# Altium PCB FIT_PM_Dual_Range_AFE.PcbDoc (part 15 of 17)
Units mm, origin at the board's own origin, x right, y up, seen from the top; angles counter-clockwise.
Board outline 259 x 114 mm, 8 copper layers (Top Layer, Mid-Layer 1, Mid-Layer 2, Layer 1, Layer 2, Mid-Layer 3, Mid-Layer 4, Bottom Layer), stack 1.616 mm thick; 963 components, 806 nets, 4757 pads, 2208 vias.
Unrouted connection lines stored in the file: 682.
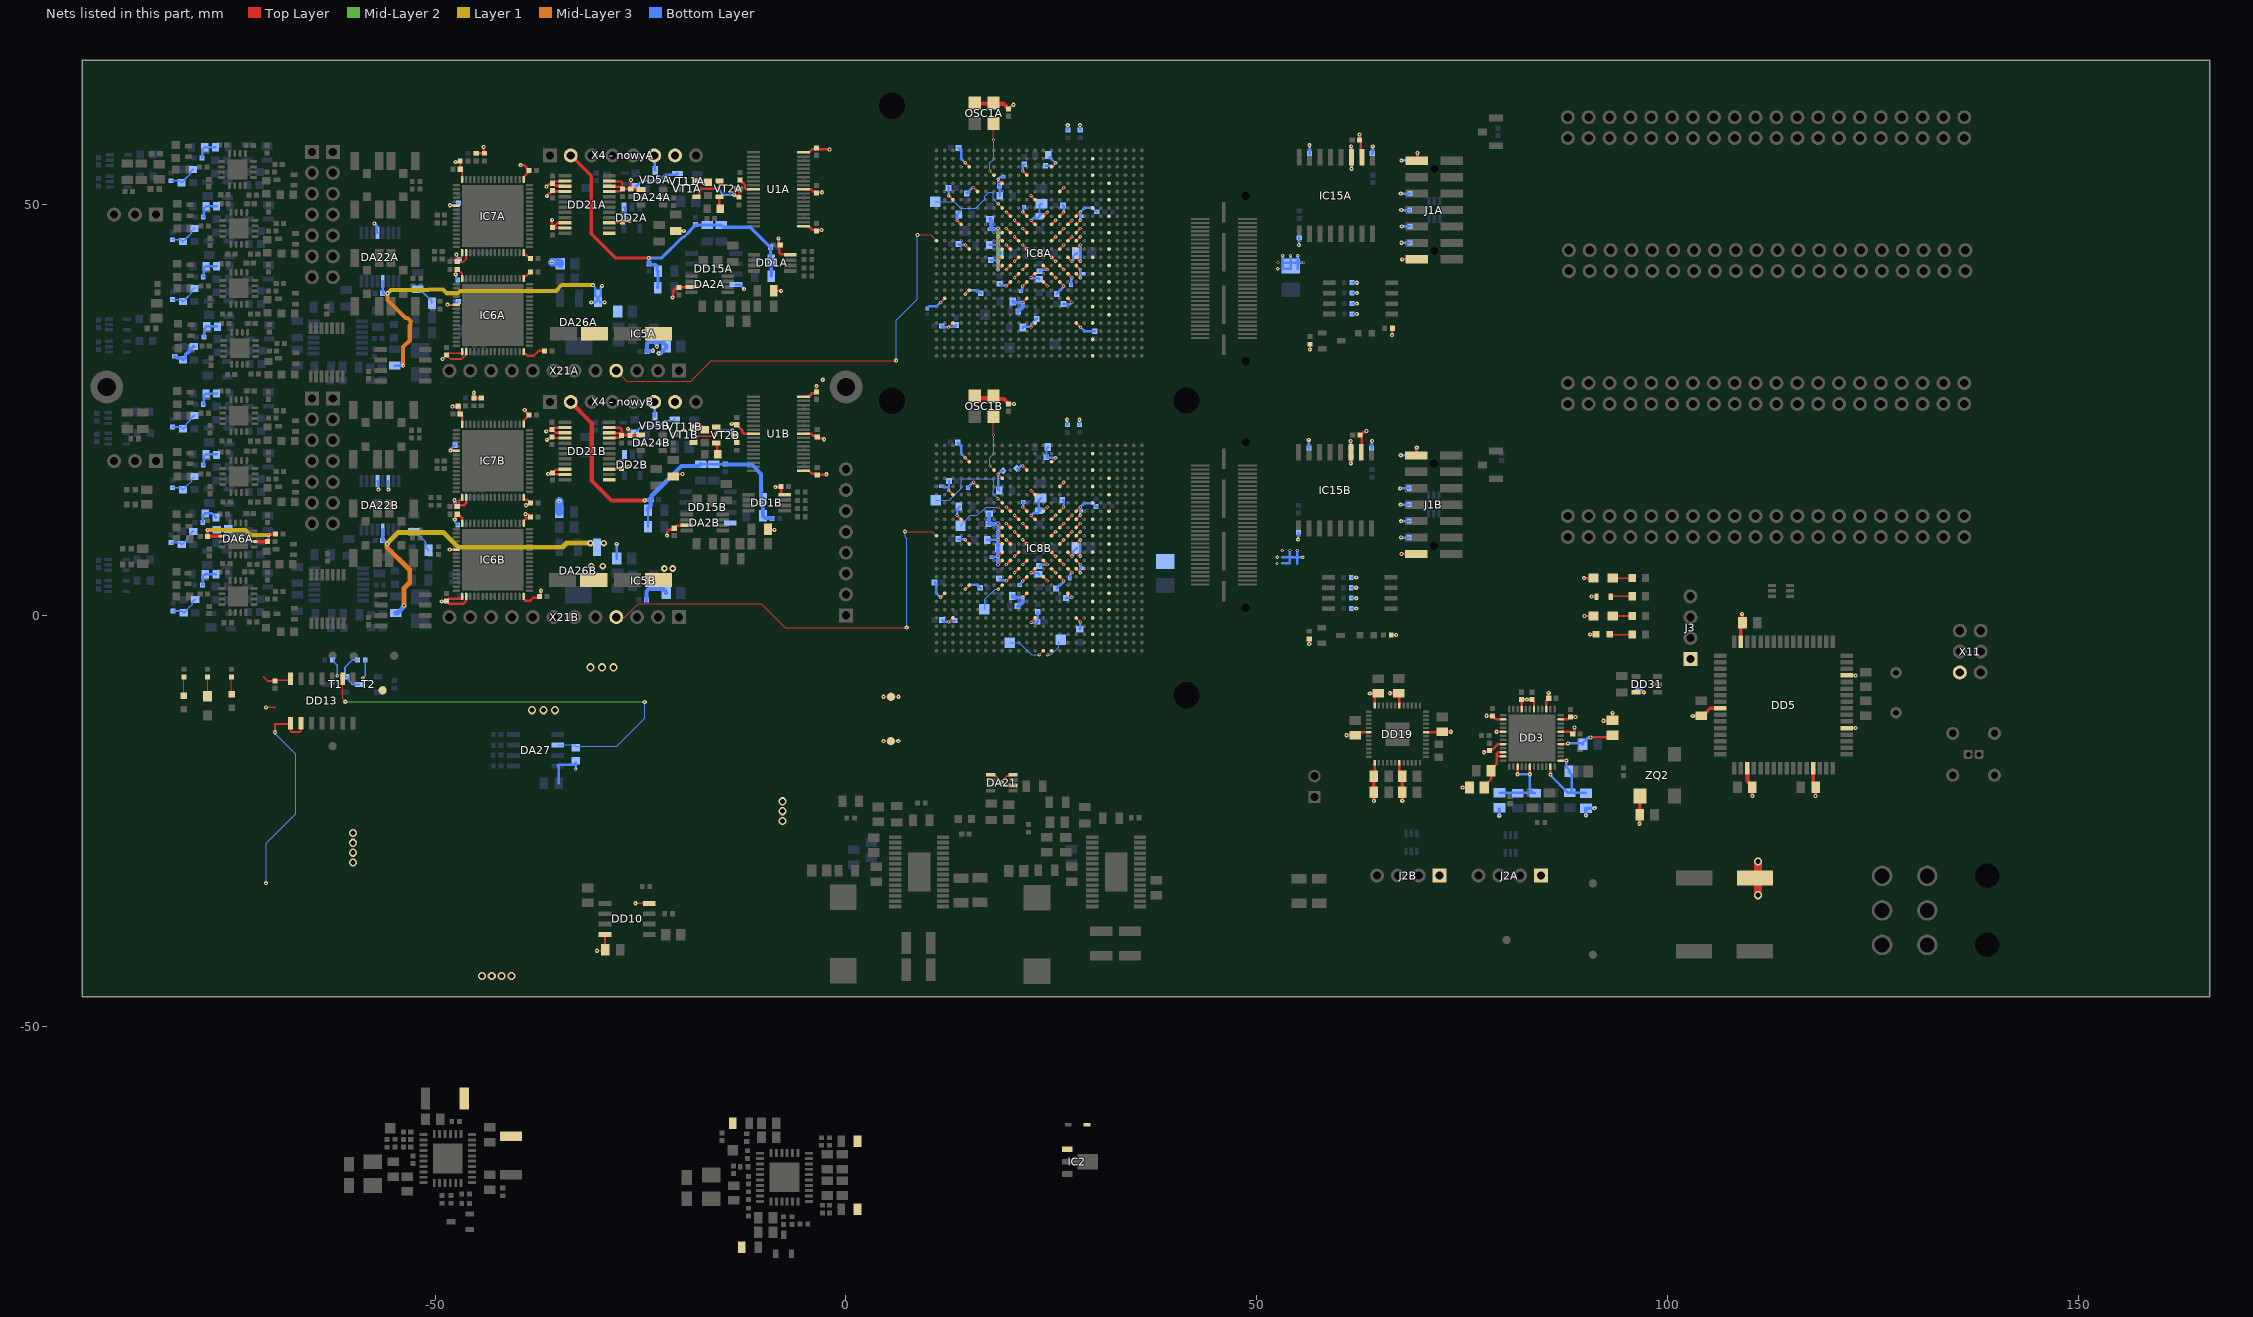
[diagram p17: the nets of this part, all layers, seen from the top]

## Via types
v1: diameter 0.5, hole 0.2, Top Layer to Bottom Layer, tented both sides, 1234 vias
v2: diameter 0.4, hole 0.2, Top Layer to Bottom Layer, tented both sides, 876 vias
v3: diameter 1, hole 0.6, Top Layer to Bottom Layer, tented both sides, 74 vias
v4: diameter 0.8, hole 0.4, Top Layer to Bottom Layer, tented both sides, 15 vias
v5: diameter 0.5, hole 0.2, Top Layer to Bottom Layer, 9 vias

## Nets (pads, with @x,y where several pads share a name; then routed paths per layer and width w, separated by ;. In a path a pad name is that pad's centre, name@x,y a point inside that pad or via, vN(x,y) a via of type N, cw(c..) or ccw(c..) an arc to the next point about the centre after c; other vN are vias at no path point) (continued)
NetIC8A_W18: IC8A.W18 TP2A.1 | length 10.6
  Top Layer w0.145: v2(18.519,50.086) IC8A.W18@19.019,49.586
  Bottom Layer w0.145: TP2A.1@10.891,50.356 13.149,50.356 13.957,49.548 15.781,49.548 16.892,50.658 16.892,50.985 17.39,51.484 17.727,51.484 17.902,51.309 17.902,50.703 v2(18.519,50.086)
NetIC8B_A12: IC8B.A12 TP6B.1 | length 3.2
  Top Layer w0.145: v2(24.519,-4.814) IC8B.A12@25.019,-4.314
  Bottom Layer w0.145: v2(24.519,-4.814) 24.953,-4.814 25.896,-3.871 TP6B.1@25.896,-3.189
NetIC8B_A13: IC8B.A13 TP5B.1 | length 4.9
  Top Layer w0.145: v2(23.519,-4.814) IC8B.A13@24.019,-4.314
  Bottom Layer w0.145: TP5B.1@19.919,-3.314 21.119,-3.314 22.619,-4.814 v2(23.519,-4.814)
NetIC8B_J18: IC8B.J18 TP4B.1 | length 4.1
  Top Layer w0.145: v2(18.519,3.186) IC8B.J18@19.019,3.686
  Bottom Layer w0.145: TP4B.1@16.919,0.686 16.919,1.955 18.15,3.186 v2(18.519,3.186)
NetIC8B_V18: IC8B.V18 TP3B.1 | length 6.3
  Top Layer w0.145: v2(18.512,13.186) 18.515,13.186 19.015,12.686 IC8B.V18@19.019,12.686
  Bottom Layer w0.145: TP3B.1@13.942,10.922 14.504,11.484 14.504,11.535 15.135,12.167 15.973,12.167 16.62,12.813 16.7,12.813 17.073,13.186 v2(18.512,13.186)
NetIC8B_W18: IC8B.W18 TP2B.1 | length 12
  Top Layer w0.145: v2(18.512,14.186) 18.515,14.186 19.015,13.686 IC8B.W18@19.019,13.686
  Bottom Layer w0.145: TP2B.1@10.919,13.995 10.952,14.028 12.566,14.028 14.01,15.472 14.01,16.375 14.235,16.6 17.74,16.6 17.994,16.347 17.994,15.375 17.902,15.283 17.902,14.803 18.512,14.193 v2(18.512,14.186)
NetIC15A_3: IC15A.3 R169A.2 | length 2.3
  Top Layer w0.145: IC15A.3@61.524,55.736 61.532,55.728 v1(61.532,54.363)
  Bottom Layer w0.35: R169A.2@61.524,55.266 61.528,55.262 61.528,54.367 v1(61.532,54.363)
NetIC15B_3: IC15B.3 R169B.2 | length 2.3
  Top Layer w0.145: IC15B.3@61.449,19.872 61.457,19.864 v1(61.457,18.499)
  Bottom Layer w0.35: R169B.2@61.449,19.402 61.453,19.398 61.453,18.503 v1(61.457,18.499)
NetJ1A_14: J1A.14 R156A.1 | length 1.8
  Top Layer w0.3: J1A.14@69.494,55.336 69.548,55.39 v1(69.548,56.271)
  Bottom Layer w0.3: v1(69.548,56.271) 69.554,56.266 69.554,55.397 R156A.1@69.559,55.391
NetJ1B_14: J1B.14 R156B.1 | length 1.8
  Top Layer w0.3: J1B.14@69.419,19.472 69.473,19.526 v1(69.473,20.408)
  Bottom Layer w0.3: v1(69.473,20.408) 69.479,20.402 69.479,19.534 R156B.1@69.484,19.528
NetLD1_2: LD1.2 R147.2 | length 2.1
  Top Layer w0.145: R147.2@-74.798,-7.494 -74.798,-9.572 LD1.2@-74.781,-9.589
NetLD2_1: LD2.1 R160.2 | length 2.3
  Top Layer w0.2: LD2.1@93.194,2.336 R160.2@95.519,2.336
NetLD3_1: LD3.1 R162.2 | length 2.3
  Top Layer w0.2: LD3.1@93.344,-2.347 R162.2@95.669,-2.347
NetLD4_1: LD4.1 R114.2 | length 2.3
  Top Layer w0.145: R114.2@-80.597,-7.494 -80.581,-7.51 LD4.1@-80.581,-9.789
NetR13A_1: R13A.1 R233A.2 R234A.2 | length 2.8
  Bottom Layer w0.3: R233A.2@-78.3,11.3 -78.3,12.1 R234A.2@-78,12.4 -77.2,12.4 -77.05,12.25 -76.975,12.25 -76.7,11.975 R13A.1@-76.7,11.9
NetR13B_1: R13B.1 R233B.2 R234B.2 | length 2.7
  Bottom Layer w0.3: R233B.2@-78.23,25.7 -78.2,25.73 -78.2,26.7 R234B.2@-77.9,27 R13B.1@-76.6,27
NetR13C_1: R13C.1 R233C.2 R234C.2 | length 2.7
  Bottom Layer w0.3: R233C.2@-78.23,41.2 -78.2,41.23 -78.2,42.2 R234C.2@-77.9,42.5 R13C.1@-76.6,42.5
NetR13D_1: R13D.1 R233D.2 R234D.2 | length 2.7
  Bottom Layer w0.3: R233D.2@-78.398,55.668 -78.368,55.698 -78.368,56.668 R234D.2@-78.068,56.968 R13D.1@-76.768,56.968
NetR19A_1: R19A.1 R235A.2 R236A.2 | length 3.6
  Bottom Layer w0.2: R235A.2@-82.15,8.855 -81.08,8.855 R236A.2@-80.85,8.625 -80.8,8.625 -80.2,9.225 -80.2,9.475 -79.85,9.825 -79.85,9.9 -79.525,10.225 R19A.1@-79.45,10.225
NetR19B_1: R19B.1 R235B.2 R236B.2 | length 3.6
  Bottom Layer w0.2: R235B.2@-82,22.93 -80.93,22.93 R236B.2@-80.7,22.7 -80.663,22.7 -80.313,23.05 -80.313,23.287 -79.7,23.9 -79.7,23.975 -79.375,24.3 R19B.1@-79.3,24.3
NetR19C_1: R19C.1 R235C.2 R236C.2 | length 3.6
  Bottom Layer w0.2: R235C.2@-82,38.43 -80.93,38.43 R236C.2@-80.7,38.2 -80.65,38.2 -80.3,38.55 -80.3,38.6 -79.675,39.225 -79.675,39.475 -79.35,39.8 R19C.1@-79.3,39.8
NetR19D_1: R19D.1 R235D.2 R236D.2 | length 3.6
  Bottom Layer w0.2: R235D.2@-82.168,52.898 -81.098,52.898 R236D.2@-80.868,52.668 -80.818,52.668 -80.468,53.018 -80.468,53.068 -79.843,53.693 -79.843,53.943 -79.518,54.268 R19D.1@-79.468,54.268
NetR33A_1: R33A.1 R237A.2 R238A.2 | length 2.7
  Bottom Layer w0.3: R238A.2@-78.33,3.7 -78.3,3.73 -78.3,4.7 R237A.2@-78,5 R33A.1@-76.7,5
NetR33B_1: R33B.1 R237B.2 R238B.2 | length 2.7
  Bottom Layer w0.3: R238B.2@-78.23,18.3 -78.2,18.33 -78.2,19.3 R237B.2@-77.9,19.6 R33B.1@-76.6,19.6
NetR33C_1: R33C.1 R237C.2 R238C.2 | length 2.7
  Bottom Layer w0.3: R238C.2@-78.13,33.9 -78.1,33.93 -78.1,34.9 R237C.2@-77.8,35.2 R33C.1@-76.5,35.2
NetR33D_1: R33D.1 R237D.2 R238D.2 | length 2.7
  Bottom Layer w0.3: R238D.2@-78.23,48.5 -78.2,48.53 -78.2,49.5 R237D.2@-77.9,49.8 R33D.1@-76.6,49.8
NetR38A_1: R38A.1 R239A.2 R240A.2 | length 3.6
  Bottom Layer w0.2: R240A.2@-81.9,0.53 -80.83,0.53 R239A.2@-80.6,0.3 -80.55,0.3 -80.2,0.65 -80.2,0.7 -79.575,1.325 -79.575,1.575 -79.25,1.9 R38A.1@-79.2,1.9
NetR38B_1: R38B.1 R239B.2 R240B.2 | length 3.6
  Bottom Layer w0.15: R239B.2@-80.7,15.3 -80.65,15.3 -80.275,15.675 -80.275,15.725 -79.662,16.338 -79.662,16.55 -79.312,16.9 R38B.1@-79.3,16.9
  Bottom Layer w0.2: R240B.2@-82,15.53 -80.93,15.53 R239B.2@-80.7,15.3
NetR38C_1: R38C.1 R239C.2 R240C.2 | length 3.4
  Bottom Layer w0.4: R240C.2@-81.7,31.53 -81.68,31.53 -81.5,31.35 -80.95,31.35 R239C.2@-80.7,31.1 -80.65,31.1 -80.4,31.35 -80.4,31.716 -80.166,31.95 -80.076,31.95 -79.9,32.126 -79.9,32.275 -79.475,32.7 R38C.1@-79.4,32.7
NetR38D_1: R38D.1 R239D.2 R240D.2 | length 3.6
  Bottom Layer w0.2: R240D.2@-82,45.73 -80.93,45.73 R239D.2@-80.7,45.5 -80.65,45.5 -80.3,45.85 -80.3,45.9 -79.675,46.525 -79.675,46.775 -79.35,47.1 R38D.1@-79.3,47.1
NetR44A_1: R44A.1 R46A.2 | length 2.5
  Bottom Layer w0.2: R46A.2@-52.1,39.7 -51.725,39.325 -51.5,39.325 -50.4,38.225 R44A.1@-50.4,38
NetR44B_1: R44B.1 R46B.2 | length 3.2
  Bottom Layer w0.2: R46B.2@-52.624,10.179 -52.399,10.179 -51.175,8.955 -51.175,8.275 R44B.1@-50.8,7.9
NetR49A_1: R49A.1 VT1A.2 | length 1.5
  Top Layer w0.5: VT1A.2@-18.2,52.85 -18.15,52.8 -16.9,52.8 R49A.1@-16.8,52.7
NetR49B_1: R49B.1 VT1B.2 | length 1.5
  Top Layer w0.5: VT1B.2@-18.55,22.95 -18.5,22.9 -17.55,22.9 -17.25,22.6 R49B.1@-17.2,22.6
NetR50A_1: R50A.1 VT2A.2 | length 1.5
  Top Layer w0.3: VT2A.2@-15.4,50.95 -15.4,49.6 R50A.1@-15.3,49.5
NetR50B_1: R50B.1 VT2B.2 | length 1.5
  Top Layer w0.3: VT2B.2@-15.8,21 -15.65,20.85 -15.65,19.65 R50B.1@-15.6,19.6
NetR51A_2: R51A.2 VT1A.1 VT2A.1 VT2A.3 | length 8.4
  Top Layer w0.3: VT1A.1@-18.2,50.95 -18,50.95 -17.85,51.1 -17.85,51.65 -17.6,51.9 v1(-15.6,51.9) -15.4,52.1 VT2A.1@-15.4,52.85 ; v1(-13.6,51.2) -13.44,51.04 -13.14,51.04 R51A.2@-13,50.9 -13,51.8 VT2A.3@-13.1,51.9
  Bottom Layer w0.3: v1(-15.6,51.9) -14.9,51.2 v1(-13.6,51.2)
NetR51B_2: R51B.2 VT1B.1 VT2B.1 VT2B.3 | length 8.1
  Top Layer w0.2: VT1B.1@-18.55,21.05 -18.35,21.05 -18.15,21.25 -18.15,21.65 -18,21.8 -16.1,21.8 v1(-15.8,22.1) VT2B.1@-15.8,22.9 ; v1(-13.797,22.503) -13.797,22.15 -13.8,22.15 -13.6,21.95 VT2B.3@-13.5,21.95 -13.3,21.75 R51B.2@-13.3,21.04
  Bottom Layer w0.2: v1(-15.8,22.1) -15.397,22.503 v1(-13.797,22.503)
NetR54A_2: R54A.2 VT11A.4 | length 5.8
  Bottom Layer w0.3: R54A.2@-25.6,52.2 -25.55,52.2 -24.85,52.9 -22.7,52.9 -21.95,53.65 -20.65,53.65 VT11A.4@-20.5,53.8
NetR54B_2: R54B.2 VT11B.4 | length 5.6
  Bottom Layer w0.2: R54B.2@-25.7,22.2 -25.65,22.2 -24.85,23 -22.8,23 -22.1,23.7 -21.05,23.7 VT11B.4@-20.85,23.9
NetR83_1: R83.1 T1.1 T2.3 | length 5.3
  Bottom Layer w0.2: R83.1@-59.451,-5.414 -59.483,-5.447 -60.095,-5.447 -60.981,-6.333 T1.1@-60.981,-7.464 -60.781,-7.464 -60.556,-7.689 -60.556,-7.889 -60.031,-8.414 T2.3@-59.243,-8.414
NetR113_2: R113.2 VD4.1 | length 2.4
  Top Layer w0.145: R113.2@-77.697,-7.494 -77.694,-7.497 VD4.1@-77.694,-9.85
NetR146_2: R146.2 VD8.1 | length 2.3
  Top Layer w0.2: VD8.1@93.294,4.536 VD8.1@93.344,4.536 R146.2@95.619,4.536
NetR161_2: R161.2 VD13.1 | length 2.3
  Top Layer w0.2: VD13.1@93.344,-0.081 R161.2@95.669,-0.081
OSC1A: IC8A.AC19 OSC1A.3 | length 6.2
  Top Layer w0.145: v2(17.519,54.086) IC8A.AC19@18.019,53.586 ; v2(17.949,57.849) 17.949,59.344 OSC1A.3@17.965,59.36
  Bottom Layer w0.145: v2(17.519,54.086) 17.519,55.086 17.979,55.546 17.979,57.818 v2(17.949,57.849)
OSC1B: IC8B.AC19 OSC1B.3 | length 6.2
  Top Layer w0.145: v2(17.519,18.186) IC8B.AC19@18.019,17.686 ; v2(17.949,21.949) 17.949,23.444 OSC1B.3@17.965,23.46
  Bottom Layer w0.145: v2(17.519,18.186) 17.519,19.186 17.979,19.646 17.979,21.918 v2(17.949,21.949)
out_RANGE_SEL1: IC8A.R26 X21A.4 | length 54.6
  Top Layer w0.145: X21A.4@-27.96,29.78 -26.68,28.5 -18.9,28.5 -16.4,31 v1(6.109,31) ; v1(8.7,46.3) 10.305,46.3 IC8A.R26@11.019,45.586
  Bottom Layer w0.145: v1(6.109,31) 6.109,35.909 8.7,38.5 v1(8.7,46.3)
out_RANGE_SEL2: IC8B.R26 X21B.4 | length 53
  Top Layer w0.145: X21B.4@-27.96,-0.22 -26.92,-0.22 -25.303,1.397 -10.297,1.397 -7.4,-1.5 v1(7.4,-1.5) ; v1(7.2,10.2) 10.505,10.2 IC8B.R26@11.019,9.686
  Bottom Layer w0.145: v1(7.2,10.2) 7.2,9.5 7.4,9.3 v1(7.4,-1.5)
OVERTEMPn: DA27.6 DD13.9 R151.1 | length 53.4
  Top Layer w0.15: DD13.9@-61.257,-7.724 -61.257,-10.156 -60.948,-10.466 v1(-60.948,-10.518)
  Mid-Layer 2 w0.15: v1(-60.948,-10.518) -60.941,-10.524 v1(-24.497,-10.524)
  Bottom Layer w0.15: DA27.6@-35.069,-15.779 -33.016,-15.779 -32.881,-15.914 -27.881,-15.914 -24.497,-12.531 v1(-24.497,-10.524)
P0V9_MGT: IC8A.AA7 IC8A.AC7 IC8A.J7 IC8A.L7 IC8A.N7 IC8A.W7 IC8B.AA7 IC8B.AC7 IC8B.J7 IC8B.L7 IC8B.N7 IC8B.W7 R95.2
P0V85: C80A.2 C80B.2 C81A.2 C81B.2 C83A.2 C83B.2 C84A.2 C84B.2 C85A.2 C85B.2 C147A.2 C147B.2 C152A.2 C152B.2 C157A.2 C157B.2 C158A.2 C158B.2 C159A.2 C159B.2 C160A.2 C160B.2 C161A.2 C161B.2 C162A.2 C162B.2 C163A.1 C163B.1 IC8A.K11 IC8A.K13 IC8A.K15 IC8A.K17 IC8A.L9 IC8A.L10 IC8A.L12 IC8A.L14 IC8A.L16 IC8A.M9 IC8A.M11 IC8A.M13 IC8A.M15 IC8A.M17 IC8A.N9 IC8A.N10 IC8A.N12 IC8A.N16 IC8A.P9 IC8A.P11 IC8A.P15 IC8A.P17 IC8A.R9 IC8A.R10 IC8A.R12 IC8A.R16 IC8A.T9 IC8A.T11 IC8A.T15 IC8A.T17 IC8A.U9 IC8A.U10 IC8A.U12 IC8A.U14 IC8A.U16 IC8A.V9 IC8A.V11 IC8A.V13 IC8A.V15 IC8A.V17 IC8B.K11 IC8B.K13 IC8B.K15 IC8B.K17 IC8B.L9 IC8B.L10 IC8B.L12 IC8B.L14 IC8B.L16 IC8B.M9 IC8B.M11 IC8B.M13 IC8B.M15 IC8B.M17 IC8B.N9 IC8B.N10 IC8B.N12 IC8B.N16 IC8B.P9 IC8B.P11 IC8B.P15 IC8B.P17 IC8B.R9 IC8B.R10 IC8B.R12 IC8B.R16 IC8B.T9 IC8B.T11 IC8B.T15 IC8B.T17 IC8B.U9 IC8B.U10 IC8B.U12 IC8B.U14 IC8B.U16 IC8B.V9 IC8B.V11 IC8B.V13 IC8B.V15 IC8B.V17 R37.2 R145A.2 R145B.2 | length 109.7
  Top Layer w0.3: v2(19.519,4.186) IC8B.K17@20.019,4.686 ; v2(19.519,6.186) IC8B.M17@20.019,6.686 ; v2(19.519,9.186) IC8B.P17@20.019,8.686 ; v2(19.519,11.186) IC8B.T17@20.019,10.686 ; v2(19.519,13.186) IC8B.V17@20.019,12.686 ; v2(19.519,40.086) IC8A.K17@20.019,40.586 ; v2(19.519,42.086) IC8A.M17@20.019,42.586 ; v2(19.519,45.086) IC8A.P17@20.019,44.586 ; v2(19.519,47.086) IC8A.T17@20.019,46.586 ; v2(19.519,49.086) IC8A.V17@20.019,48.586 ; v2(20.519,5.186) IC8B.L16@21.019,5.686 ; v2(20.519,7.186) IC8B.N16@21.019,7.686 ; v2(20.519,10.186) IC8B.R16@21.019,9.686 ; v2(20.519,12.186) IC8B.U16@21.019,11.686 ; v2(20.519,41.086) IC8A.L16@21.019,41.586 ; v2(20.519,43.086) IC8A.N16@21.019,43.586 ; v2(20.519,46.086) IC8A.R16@21.019,45.586 ; v2(20.519,48.086) IC8A.U16@21.019,47.586 ; v2(21.519,4.186) IC8B.K15@22.019,4.686 ; v2(21.519,6.186) IC8B.M15@22.019,6.686 ; v2(21.519,9.186) IC8B.P15@22.019,8.686 ; v2(21.519,11.186) IC8B.T15@22.019,10.686 ; v2(21.519,13.186) IC8B.V15@22.019,12.686 ; v2(21.519,40.086) IC8A.K15@22.019,40.586 ; v2(21.519,42.086) IC8A.M15@22.019,42.586 ; v2(21.519,45.086) IC8A.P15@22.019,44.586 ; v2(21.519,47.086) IC8A.T15@22.019,46.586 ; v2(21.519,49.086) IC8A.V15@22.019,48.586 ; v2(22.519,5.186) IC8B.L14@23.019,5.686 ; v2(22.519,12.186) IC8B.U14@23.019,11.686 ; v2(22.519,41.086) IC8A.L14@23.019,41.586 ; v2(22.519,48.086) IC8A.U14@23.019,47.586 ; IC8B.K13@24.019,4.686 v2(24.519,4.186) ; IC8B.M13@24.019,6.686 v2(24.519,6.186) ; IC8B.V13@24.019,12.686 v2(24.519,13.186) ; IC8A.K13@24.019,40.586 v2(24.519,40.086) ; IC8A.M13@24.019,42.586 v2(24.519,42.086) ; IC8A.V13@24.019,48.586 v2(24.519,49.086) ; IC8B.L12@25.019,5.686 v2(25.519,5.186) ; IC8B.N12@25.019,7.686 v2(25.519,7.186) ; IC8B.R12@25.019,9.686 v2(25.519,10.186) ; IC8B.U12@25.019,11.686 v2(25.519,12.186) ; IC8A.L12@25.019,41.586 v2(25.519,41.086) ; IC8A.N12@25.019,43.586 v2(25.519,43.086) ; IC8A.R12@25.019,45.586 v2(25.519,46.086) ; IC8A.U12@25.019,47.586 v2(25.519,48.086) ; IC8B.K11@26.019,4.686 v2(26.519,4.186) ; IC8B.M11@26.019,6.686 v2(26.519,6.186) ; IC8B.P11@26.019,8.686 v2(26.519,9.186) ; IC8B.T11@26.019,10.686 v2(26.519,11.186) ; IC8B.V11@26.019,12.686 v2(26.519,13.186) ; IC8A.K11@26.019,40.586 v2(26.519,40.086) ; IC8A.M11@26.019,42.586 v2(26.519,42.086) ; IC8A.P11@26.019,44.586 v2(26.519,45.086) ; IC8A.T11@26.019,46.586 v2(26.519,47.086) ; IC8A.V11@26.019,48.586 v2(26.519,49.086) ; IC8B.L10@27.019,5.686 v2(27.519,5.186) ; IC8B.N10@27.019,7.686 v2(27.519,7.186) ; IC8B.R10@27.019,9.686 v2(27.519,10.186) ; IC8B.U10@27.019,11.686 v2(27.519,12.186) ; IC8A.L10@27.019,41.586 v2(27.519,41.086) ; IC8A.N10@27.019,43.586 v2(27.519,43.086) ; IC8A.R10@27.019,45.586 v2(27.519,46.086) ; IC8A.U10@27.019,47.586 v2(27.519,48.086) ; IC8B.L9@28.019,5.686 v2(28.519,5.186) ; IC8B.M9@28.019,6.686 v2(28.519,6.186) ; IC8B.N9@28.019,7.686 v2(28.519,7.186) ; IC8B.P9@28.019,8.686 v2(28.519,9.186) ; IC8B.R9@28.019,9.686 v2(28.519,10.186) ; IC8B.T9@28.019,10.686 v2(28.519,11.186) ; IC8B.U9@28.019,11.686 v2(28.519,12.186) ; IC8B.V9@28.019,12.686 v2(28.519,13.186) ; IC8A.L9@28.019,41.586 v2(28.519,41.086) ; IC8A.M9@28.019,42.586 v2(28.519,42.086) ; IC8A.N9@28.019,43.586 v2(28.519,43.086) ; IC8A.P9@28.019,44.586 v2(28.519,45.086) ; IC8A.R9@28.019,45.586 v2(28.519,46.086) ; IC8A.T9@28.019,46.586 v2(28.519,47.086) ; IC8A.U9@28.019,47.586 v2(28.519,48.086) ; IC8A.V9@28.019,48.586 v2(28.519,49.086)
  Bottom Layer w0.3: C157B.2@18.704,4.468 18.909,4.263 19.388,4.263 19.465,4.186 v2(19.519,4.186) ; C157A.2@18.704,40.368 18.909,40.163 19.388,40.163 19.465,40.086 v2(19.519,40.086) ; C160B.2@21.164,3.711 21.189,3.711 21.246,3.768 21.246,3.886 21.519,4.159 v2(21.519,4.186) ; C160A.2@21.303,39.439 21.328,39.439 21.403,39.514 21.403,39.539 21.481,39.617 21.481,40.048 v2(21.519,40.086) ; C159B.2@21.494,13.747 21.494,13.772 21.569,13.847 C159B.2@21.594,13.847 ; v2(21.519,13.186) 21.557,13.224 21.557,13.699 C159B.2@21.569,13.71 ; v2(21.519,49.086) 21.557,49.124 21.557,49.599 21.569,49.61 21.569,49.635 21.644,49.71 C159A.2@21.669,49.71 ; v2(22.519,5.186) 22.557,5.148 23.357,5.148 C80B.2@23.519,4.986 ; v2(22.519,12.186) 22.573,12.186 22.82,12.433 23.304,12.433 23.804,12.933 24.212,12.933 24.465,13.186 v2(24.519,13.186) ; v2(22.519,41.086) 22.557,41.048 23.357,41.048 C80A.2@23.519,40.886 ; v2(22.519,48.086) 22.573,48.086 22.82,48.333 23.304,48.333 C81A.2@23.554,48.583 ; C81B.2@23.479,12.719 23.479,14.005 C84B.2@23.721,14.247 ; C147B.2@23.573,5.986 23.754,6.166 24.499,6.166 v2(24.519,6.186) ; C147A.2@23.573,41.886 23.754,42.066 24.499,42.066 v2(24.519,42.086) ; C84A.2@23.796,50.11 23.554,49.869 C81A.2@23.554,48.583 ; v2(24.519,49.086) 24.465,49.086 24.212,48.833 23.804,48.833 C81A.2@23.554,48.583 ; C152B.2@25.646,3.239 25.646,3.244 26.481,4.079 26.481,4.148 v2(26.519,4.186) ; C152A.2@25.646,39.139 25.646,39.144 26.481,39.979 26.481,40.048 v2(26.519,40.086) ; C85B.2@26.41,13.995 26.481,13.924 26.481,13.224 v2(26.519,13.186) ; C85A.2@26.41,49.895 26.481,49.824 26.481,49.124 v2(26.519,49.086) ; C162B.2@27.274,4.44 27.287,4.452 27.287,4.953 v2(27.519,5.186) ; C162A.2@27.394,40.232 27.394,40.934 27.519,41.059 v2(27.519,41.086) ; v2(27.519,7.186) 27.519,7.24 27.664,7.384 27.664,7.761 C83B.2@28.089,8.186 ; v2(27.519,43.086) 27.519,43.14 27.664,43.284 27.664,43.661 C83A.2@28.089,44.086 ; v2(28.519,5.186) v2(28.519,6.186) ; v2(28.519,7.186) v2(28.519,9.186) ; v2(28.519,12.186) v2(28.519,13.186) 28.969,13.636 30.077,13.636 30.284,13.429 30.284,13.392 30.461,13.216 R145B.2@30.499,13.216 ; v2(28.519,41.086) v2(28.519,42.086) ; v2(28.519,43.086) v2(28.519,45.086) ; v2(28.519,48.086) v2(28.519,49.086) 29.019,49.586 30.029,49.586 30.499,49.116 R145A.2@30.519,49.116 ; 53.119,6.322 54.044,6.322 54.044,7.079 ; 53.119,7.079 54.044,7.079 ; C163A.1@53.119,42.186 C163A.1@53.179,42.186 ; C163A.1@53.119,42.943 C163A.1@53.179,42.943 ; C163A.1@53.179,42.117 C163A.1@53.179,42.186 ; v2@53.179,43.686 C163A.1@53.179,42.943 ; v2(54.044,7.891) 54.044,7.079 ; v2(54.119,43.754) C163A.1@54.119,42.943 ; 54.919,6.286 54.919,7.079 ; v2@54.919,7.854 54.919,7.079 ; C163A.1@54.994,42.149 C163A.1@54.994,42.943 ; v2@54.994,43.718 C163A.1@54.994,42.943 ; v2(55.613,7.079) 54.919,7.079 ; v2(55.688,42.943) C163A.1@54.994,42.943 ; C163A.1@53.179,42.186 54.119,42.186 C163A.1@54.119,42.536 C163A.1@54.119,42.943 ; C163A.1@53.179,42.186 C163A.1@53.179,42.943 ; C163A.1@53.179,42.943 C163A.1@54.119,42.943 ; 54.044,7.079 54.919,7.079 ; C163A.1@54.119,42.943 C163A.1@54.994,42.943
  other v2: 52.476,6.322 52.51,7.079 53.104,7.891 54.919,7.891 52.551,42.186 52.585,42.943 53.179,43.754 54.994,43.754
P1V2_VCCMGTT: IC8A.A7 IC8A.AB5 IC8A.AE7 IC8A.C7 IC8A.E7 IC8A.F5 IC8A.G7 IC8A.H5 IC8A.K5 IC8A.M5 IC8A.P5 IC8A.T5 IC8A.V5 IC8A.Y5 IC8B.A7 IC8B.AB5 IC8B.AE7 IC8B.C7 IC8B.E7 IC8B.F5 IC8B.G7 IC8B.H5 IC8B.K5 IC8B.M5 IC8B.P5 IC8B.T5 IC8B.V5 IC8B.Y5 R52.2
P1V3_CFDA: "X4 - nowyA.2" C101A.2 C113A.2 C117A.2 R10A.2 R115A.2 R116A.2 R117A.2 R119A.2 R120A.2 | length 44.5
  Top Layer w0.4: -33.5,55.98 -31.009,53.489 -31.009,46.452 -28.057,43.5 v1(-24,43.5)
  Bottom Layer w0.4: R116A.2@-22.9,39.9 -22.893,39.907 -22.893,41.881 R115A.2@-22.887,41.888 -23,42.001 -23,42.566 -23.124,42.69 -23.89,42.69 C101A.2@-24,42.8 v1(-24,43.5) -22.4,43.5 -19.91,45.99 -19.779,45.99 -18.976,46.793 -18.976,46.874 C117A.2@-18.3,47.55 -18.275,47.525 -16.925,47.525 R120A.2@-16.9,47.5 R119A.2@-15.2,47.5 -14.925,47.225 -11.625,47.225 C113A.2@-9.2,44.8 -9.2,43.3 R117A.2@-9.1,43.2 R10A.2@-9.1,41.3
P1V3_CFDB: "X4 - nowyB.2" C101B.2 C113B.2 C117B.2 R10B.2 R115B.2 R116B.2 R117B.2 R119B.2 R120B.2 | length 44.5
  Top Layer w0.5: -33.5,25.98 -30.949,23.429 -30.949,16.423 -28.526,14 v1(-24.5,14)
  Bottom Layer w0.3: R116B.2@-24.1,10.8 R115B.2@-24.1,12.8 ; R120B.2@-17.7,18.4 R119B.2@-16.1,18.4 C117B.2@-14.7,18.4
  Bottom Layer w0.5: v1(-24.5,14) -24.46,14.04 -23.76,14.04 -23.76,13.365 -24.1,13.025 R115B.2@-24.1,12.8 ; C101B.2@-23.7,14.1 -23.64,14.16 -23.64,14.56 -20.025,18.175 -17.925,18.175 R120B.2@-17.7,18.4 ; C117B.2@-14.7,18.4 -14.64,18.34 -11.44,18.34 -10.325,17.225 -10.325,14.425 R117B.2@-10.1,14.2 R10B.2@-10.1,12.1 -10.1,12.085 -9.875,11.86 -9.06,11.86 C113B.2@-9,11.8
P1V8: B4.1 C17A.2 C17B.2 C18A.2 C18B.2 C60A.2 C60B.2 C61A.2 C61B.2 C78A.2 C78B.2 C98A.2 C98B.2 C99A.2 C99B.2 C164A.2 C164B.2 C165A.2 C165B.2 C166A.2 C166B.2 C167A.2 C167B.2 C193A.2 C193B.2 C196A.2 C196B.2 C212.2 C213.2 C217.2 C218.2 C219.2 C220.2 C222A.2 C222B.2 C223.2 C224.2 C225A.2 C225B.2 C226A.2 C226B.2 C227A.2 C227B.2 C228A.2 C228B.2 C229A.2 C229B.2 C230A.2 C230B.2 C231A.2 C231B.2 C232A.2 C232B.2 DD19.7 DD19.18 DD19.24 DD19.30 DD19.37 DD19.43 IC6A.1 IC6A.48 IC6B.1 IC6B.48 IC7A.1 IC7A.48 IC7B.1 IC7B.48 IC8A.AA11 IC8A.AA21 IC8A.AB18 IC8A.AD12 IC8A.AD22 IC8A.E24 IC8A.H25 IC8A.J22 IC8A.M18 IC8A.N18 IC8A.P18 IC8A.P22 IC8A.R7 IC8A.R18 IC8A.T18 IC8A.U7 IC8A.U23 IC8A.Y24 IC8B.AA11 IC8B.AA21 IC8B.AB18 IC8B.AD12 IC8B.AD22 IC8B.E24 IC8B.H25 IC8B.J22 IC8B.M18 IC8B.N18 IC8B.P18 IC8B.P22 IC8B.R7 IC8B.R18 IC8B.T18 IC8B.U7 IC8B.U23 IC8B.Y24 IC15A.2 IC15B.2 J1A.2 J1B.2 L7A.2 L7B.2 OSC1A.1 OSC1A.4 OSC1B.1 OSC1B.4 R3A.2 R3B.2 R20A.2 R20B.2 R21A.2 R21B.2 R84.2 R104A.2 R104B.2 R106A.2 R106B.2 R107A.2 R107B.2 R108A.2 R108B.2 R129A.2 R129B.2 R130A.2 R130B.2 R131A.2 R131B.2 R148A.2 R148B.2 R149A.2 R149B.2 R150A.2 R150B.2 R156A.2 R156B.2 R157A.2 R157B.2 R158A.2 R158B.2 R159A.2 R159B.2 R164A.2 R164B.2 R169A.1 R169B.1 | length 168.2
  Top Layer w0.2: v1(4.576,-9.914) B4.1@5.476,-9.914 v1(6.376,-9.914)
  Top Layer w0.254: v1(56.392,-3.488) R129B.2@56.393,-2.872 ; v1(56.467,32.376) R129A.2@56.468,32.992
  Top Layer w0.3: v1(-45.3,27.1) R21B.2@-45.3,26.44 R20B.2@-44.4,26.44 ; R21A.2@-45,56.24 R20A.2@-44,56.24 -44.1,56.34 v1(-44.1,57) ; v1(-39.6,54.8) -39.211,54.8 C60A.2@-38.573,54.162 -38.733,54.002 -38.733,53.85 -39.227,53.356 IC7A.1@-39.227,53.056 ; IC6B.48@-39.227,2.306 -39.227,2.006 -39.022,1.8 -38.4,1.8 -38.06,2.14 -37.46,2.14 C17B.2@-37.3,2.3 -37.14,2.46 -37.14,2.96 v1(-37.1,3) ; IC6B.1@-39.227,11.206 -39.227,11.506 -38.913,11.82 -38.539,11.82 C18B.2@-38.379,11.98 -38.698,12.3 v1(-39,12.3) ; IC7B.48@-39.227,14.356 -39.227,14.056 -38.788,14.056 C61B.2@-38.391,13.659 -38.551,13.499 -38.853,13.499 v1(-38.951,13.4) ; IC7B.1@-39.227,23.256 -39.227,23.708 C60B.2@-38.573,24.362 -39.062,24.851 -39.062,24.962 v1(-39.1,25) ; IC6A.48@-39.227,32.106 -39.227,31.809 -38.976,31.809 -38.767,31.6 -38,31.6 -37.4,32.2 C17A.2@-36.7,32.2 ; IC6A.1@-39.227,41.006 -39.227,41.28 -38.953,41.28 -38.613,41.62 -38.539,41.62 C18A.2@-38.379,41.78 ; IC7A.48@-39.227,44.156 -39.227,43.882 -38.953,43.882 -38.69,43.619 -38.551,43.619 C61A.2@-38.391,43.459 ; R3B.2@-9.5,10.5 -9.4,10.4 v1(-8.7,10.4) ; R3A.2@-8.8,39.5 v1(-7.9,39.5) ; v2(11.519,2.186) IC8B.H25@12.019,2.686 ; v2(11.519,38.086) IC8A.H25@12.019,38.586 ; v2(12.519,-0.814) IC8B.E24@13.019,-0.314 ; v2(12.519,15.186) IC8B.Y24@13.019,14.686 ; v2(12.519,35.086) IC8A.E24@13.019,35.586 ; v2(12.519,51.086) IC8A.Y24@13.019,50.586 ; v2(13.519,12.186) IC8B.U23@14.019,11.686 ; v2(13.519,48.086) IC8A.U23@14.019,47.586 ; v2(14.519,3.186) IC8B.J22@15.019,3.686 ; v2(14.519,9.186) IC8B.P22@15.019,8.686 ; v2(14.519,19.186) IC8B.AD22@15.019,18.686 ; v2(14.519,39.086) IC8A.J22@15.019,39.586 ; v2(14.519,45.086) IC8A.P22@15.019,44.586 ; v2(14.519,55.086) IC8A.AD22@15.019,54.586 ; v2(15.519,16.186) IC8B.AA21@16.019,15.686 ; v2(15.519,52.086) IC8A.AA21@16.019,51.586 ; v2(18.512,6.186) 18.515,6.186 19.015,6.686 IC8B.M18@19.019,6.686 ; v2(18.512,7.186) 18.515,7.186 19.015,7.686 IC8B.N18@19.019,7.686 ; v2(18.512,9.186) 18.515,9.186 19.015,8.686 IC8B.P18@19.019,8.686 ; v2(18.512,10.186) 18.515,10.186 19.015,9.686 IC8B.R18@19.019,9.686 ; v2(18.512,11.186) 18.515,11.186 19.015,10.686 IC8B.T18@19.019,10.686 ; v2(18.512,17.186) 18.515,17.186 19.015,16.686 IC8B.AB18@19.019,16.686 ; v2(18.519,42.086) IC8A.M18@19.019,42.586 ; v2(18.519,43.086) IC8A.N18@19.019,43.586 ; v2(18.519,45.086) IC8A.P18@19.019,44.586 ; v2(18.519,46.086) IC8A.R18@19.019,45.586 ; v2(18.519,47.086) IC8A.T18@19.019,46.586 ; v2(18.519,53.086) IC8A.AB18@19.019,52.586 ; C78B.2@19.802,25.744 v1@20.437,25.744 ; C78A.2@19.802,61.645 C78A.2@19.802,61.645 20.274,62.118 20.349,62.118 v1(20.387,62.156) ; IC8B.AA11@26.019,15.686 v2(26.519,16.186) ; IC8A.AA11@26.019,51.586 v2(26.519,52.086) ; C220.2@61.991,-14.594 62.329,-14.255 63.084,-14.255 63.126,-14.214 DD19.30@63.639,-14.214 ; v1(62.523,58.534) v1(62.523,58.534) 62.524,57.982 62.65,57.856 62.65,55.88 IC15A.2@62.794,55.736 ; IC15B.2@62.698,19.893 IC15B.2@62.719,19.872 ; IC15B.2@62.798,19.893 62.798,22.084 62.974,22.26 63.131,22.26 63.306,22.436 v1(63.36,22.436) ; C223.2@64.248,-19.581 64.369,-19.46 DD19.37@64.369,-17.944 ; DD19.24@64.369,-10.984 64.369,-9.872 64.744,-9.497 C212.2@64.763,-9.497 ; C224.2@67.291,-9.48 67.369,-9.558 DD19.18@67.369,-10.984 ; DD19.43@67.369,-17.944 67.369,-19.253 C213.2@67.705,-19.588 ; v1(67.625,7.472) J1B.2@69.419,7.472 69.429,7.472 J1B.2@69.435,7.467 ; v1(67.7,43.336) J1A.2@69.494,43.336 69.504,43.336 J1A.2@69.51,43.33 ; DD19.7@70.599,-14.214 72.509,-14.214 C217.2@72.553,-14.171
  Top Layer w0.4: v1(60.931,-14.594) C220.2@61.991,-14.594 ; v1(63.758,-9.497) C212.2@64.744,-9.497 ; v1(64.248,-22.593) C218.2@64.248,-21.544 C223.2@64.248,-19.581 ; v1(66.209,-9.48) C224.2@67.291,-9.48 ; v1(67.705,-22.588) C219.2@67.705,-21.544 C213.2@67.705,-19.588 ; C217.2@72.553,-14.171 v1(73.635,-14.171)
  Top Layer w0.5: OSC1A.1@15.665,62.36 15.741,62.284 17.889,62.284 OSC1A.4@17.965,62.36 18.049,62.276 19.172,62.276 C78A.2@19.802,61.645 ; OSC1B.1@15.721,26.419 OSC1B.4@18.006,26.419 ; OSC1B.4@17.965,26.46 OSC1B.4@18.006,26.419 ; OSC1B.4@18.021,26.419 OSC1B.4@18.006,26.419 ; C78B.2@19.802,25.745 19.214,26.334 18.091,26.334 OSC1B.4@18.006,26.419
  Mid-Layer 2 w0.4: v2(18.519,42.086) v2(18.519,43.086) v2(18.519,45.086) v2(18.519,46.086) v2(18.519,47.086)
  Bottom Layer w0.254: v1(28.411,23.808) 28.427,23.791 28.427,23.216 R130B.2@28.444,23.199 ; v1(28.486,59.671) 28.502,59.655 28.502,59.08 R130A.2@28.519,59.063 ; v1(55.044,9.222) 55.072,9.25 55.072,10.075 R108B.2@55.099,10.102 ; v1(55.119,45.086) 55.147,45.113 55.147,45.938 R108A.2@55.174,45.966 ; R104B.2@61.511,0.821 R104B.2@61.514,0.817 62.103,0.817 v1(62.107,0.814) ; R148B.2@61.511,2.091 R148B.2@61.514,2.087 62.103,2.087 v1(62.107,2.084) ; R149B.2@61.511,3.361 R149B.2@61.514,3.357 62.103,3.357 v1(62.107,3.354) ; R150B.2@61.514,4.627 61.517,4.624 62.107,4.624 v1(62.11,4.621) ; R104A.2@61.586,36.684 R104A.2@61.589,36.681 62.178,36.681 v1(62.182,36.678) ; R148A.2@61.586,37.954 R148A.2@61.589,37.951 62.178,37.951 v1(62.182,37.948) ; R149A.2@61.586,39.224 R149A.2@61.589,39.221 62.178,39.221 v1(62.182,39.218) ; R150A.2@61.589,40.491 61.592,40.488 62.182,40.488 v1(62.185,40.484)
  Bottom Layer w0.3: C196A.2@9.904,37.371 9.904,37.396 10.144,37.636 11.05,37.636 11.5,38.086 v2(11.519,38.086) ; C225B.2@10.779,4.007 10.969,3.817 10.969,2.736 v2(11.519,2.186) ; C98B.2@11.603,15.717 11.678,15.642 11.855,15.642 11.879,15.618 12.538,15.618 ; C232A.2@11.676,35.226 11.842,35.059 12.465,35.059 12.492,35.086 v2(12.519,35.086) 12.546,35.086 12.609,35.149 13.242,35.149 C166A.2@13.419,35.326 ; C165B.2@11.699,-0.59 11.904,-0.795 12.5,-0.795 v2(12.519,-0.814) 12.546,-0.814 12.638,-0.723 13.171,-0.723 C232B.2@13.269,-0.624 ; C228A.2@12.462,52.139 12.508,52.092 v2@12.508,51.097 ; v2(12.519,15.186) 12.538,15.205 12.538,15.618 ; C228B.2@12.559,16.336 12.538,16.315 12.538,15.618 ; v2(13.519,12.186) 13.519,12.24 13.571,12.292 13.571,12.945 C222B.2@13.821,13.195 ; v2(13.519,48.086) 13.519,48.14 13.571,48.192 13.571,48.845 C222A.2@13.821,49.095 ; C231B.2@13.602,21.032 13.807,20.827 13.807,20.773 14.011,20.57 14.011,19.694 v2(14.519,19.186) ; C166B.2@13.672,9.282 14.396,9.282 14.492,9.186 v2(14.519,9.186) ; C231A.2@13.677,56.895 13.882,56.69 13.882,56.617 14.019,56.48 14.019,55.586 v2(14.519,55.086) ; C225A.2@13.679,45.186 13.76,45.105 14.5,45.105 v2(14.519,45.086) ; v2(14.519,3.186) 15.042,3.709 15.999,3.709 16.175,3.533 16.175,3.522 C229B.2@16.35,3.347 16.387,3.311 C229B.2@16.425,3.311 ; v2(14.519,39.086) 15.019,39.586 15.726,39.586 15.926,39.386 16.25,39.386 C229A.2@16.425,39.211 ; C167A.2@14.7,51.362 14.705,51.362 15.41,52.067 15.5,52.067 v2(15.519,52.086) ; C196B.2@14.85,15.531 14.85,15.556 15.461,16.167 15.5,16.167 v2(15.519,16.186) ; C230B.2@17.207,9.187 17.208,9.186 v2(18.512,9.186) ; C230A.2@17.419,45.086 v2(18.519,45.086) ; C165A.2@17.632,43.239 18.339,43.239 18.492,43.086 v2(18.519,43.086) ; C193B.2@17.7,7.066 17.775,7.141 18.44,7.141 18.485,7.186 v2(18.512,7.186) ; v2(18.512,17.186) 18.539,17.186 18.971,17.618 C226B.2@19.119,17.618 ; v2@18.52,17.185 18.52,15.339 C227B.2@18.644,15.214 ; C227A.2@18.719,51.078 18.7,51.097 18.7,52.251 C226A.2@18.681,52.27 18.557,52.393 18.557,53.048 v2(18.519,53.086) 18.546,53.086 18.78,53.319 19.114,53.319 C193A.2@19.189,53.394 ; v1(26.921,23.801) 26.933,23.79 26.933,23.211 R131B.2@26.944,23.199 ; v1(26.996,59.665) 27.008,59.653 27.008,59.075 R131A.2@27.019,59.063 ; v1(56.328,21.362) 56.349,21.341 56.349,20.363 R164B.2@56.369,20.342 ; v1(56.403,57.225) 56.424,57.205 56.424,56.226 R164A.2@56.444,56.206 ; v1(61.421,21.222) 61.449,21.194 R169B.1@61.449,20.342 ; v1(61.496,57.086) 61.524,57.057 R169A.1@61.524,56.206 ; R107B.2@63.989,20.342 64.017,20.37 64.017,21.195 v1(64.044,21.222) ; R107A.2@64.064,56.206 64.092,56.233 64.092,57.058 v1(64.119,57.086) ; v1(67.459,15.461) 67.464,15.467 68.569,15.467 R106B.2@68.574,15.472 ; v1(67.508,13.482) 67.518,13.472 R159B.2@68.544,13.472 ; v1(67.525,19.484) 67.546,19.506 68.522,19.506 R156B.2@68.544,19.528 ; v1(67.534,51.325) 67.539,51.33 68.644,51.33 R106A.2@68.649,51.336 ; v1(67.551,9.488) 67.566,9.472 R157B.2@68.574,9.472 ; v1(67.575,11.473) R158B.2@68.574,11.472 ; v1(67.583,49.346) 67.593,49.336 R159A.2@68.619,49.336 ; v1(67.6,55.348) 67.621,55.37 68.597,55.37 R156A.2@68.619,55.391 ; v1(67.626,45.351) 67.641,45.336 R157A.2@68.649,45.336 ; v1@67.65,47.336 R158A.2@68.649,47.336
  Bottom Layer w0.5: C167B.2@17.359,11.139 17.403,11.184 17.403,12.314 C164B.2@17.433,12.343 ; C167B.2@17.447,11.122 18.105,11.122 18.168,11.186 v2(18.512,11.186) ; C164A.2@17.522,48.222 17.536,48.222 17.686,48.072 17.686,47.315 17.689,47.312 17.689,47.022 17.776,47.022 ; 17.764,46.947 17.839,47.022 18.456,47.022 v2(18.519,47.086) ; v2(18.512,6.186) v2(18.512,7.186) ; v2(18.512,9.186) v2(18.512,10.186) ; L7B.2@18.516,8.389 v2@18.516,9.183 ; v2@18.515,11.182 18.545,11.152 v2@18.545,10.212 ; v2@18.516,45.083 18.516,44.289 L7A.2@18.719,44.086 18.519,43.886 v2(18.519,43.086) v2(18.519,42.086) ; v2@18.516,45.089 v2@18.516,46.083 ; v2@18.519,7.186 L7B.2@18.519,7.986 ; v2@18.545,46.112 v2@18.545,47.06
  other v1: 20.444,25.736 67.65,47.336
  other v3: -31.097,-6.324 -29.697,-6.324 -28.297,-6.324
P1V8_QDCA: C8A.2 C9A.2 C10A.2 C16A.2 C55A.2 C56A.2 C58A.2 C59A.2 C62A.2 C65A.1 IC5A.5 IC6A.16 IC6A.22 IC6A.33 IC6A.34 IC7A.16 IC7A.22 IC7A.33 IC7A.34 R22A.2 R23A.2 | length 28.1
  Top Layer w0.2: v1(-49.1,31.2) C16A.2@-48.6,31.7 ; v1(-48.511,37.818) -48.505,37.812 -47.433,37.812 IC6A.22@-47.427,37.806 ; v1(-48.191,49.914) -48.152,49.875 -47.447,49.875 IC7A.22@-47.427,49.856 ; v1(-47.5,41.5) -47.526,41.526 -47.526,41.899 C10A.2@-47.316,42.109 -47.007,41.8 -46.9,41.8 -46.747,41.647 -46.747,41.025 IC6A.16@-46.727,41.006 ; v1(-47.5,55.2) -47.04,55.2 R23A.2@-46.94,55.3 -46.953,55.287 C8A.2@-46.953,54.301 -46.727,54.075 IC7A.16@-46.727,53.056 ; v1(-47.4,43.9) -47.4,43.149 C9A.2@-47.316,43.065 ; IC6A.33@-46.727,32.106 -46.727,31.956 -46.774,31.91 -48.39,31.91 C16A.2@-48.6,31.7 ; IC7A.33@-46.727,44.156 -46.745,44.139 -46.745,43.637 C9A.2@-47.316,43.065 ; IC6A.34@-46.227,32.106 -46.227,31.779 -46.6,31.406 -46.6,31.4 -46.8,31.2 -48.1,31.2 C16A.2@-48.6,31.7 ; IC7A.34@-46.227,44.156 -46.247,44.137 -46.247,43.353 -46.638,42.962 -47.213,42.962 C9A.2@-47.316,43.065
  Bottom Layer w0.2: v1(-48.511,37.818) -48.507,37.814 -47.842,37.814 -47.666,37.99 -47.41,37.99 C59A.2@-47.2,38.2 ; v1(-48.191,49.914) -48.11,49.914 -48.03,49.995 -47.386,49.995 C55A.2@-47.176,50.205 ; v1(-47.5,41.5) -47.5,41.419 -47.437,41.356 -47.437,40.996 R22A.2@-47.247,40.806 ; v1(-47.4,43.9) -47.4,43.819 -47.279,43.697 -47.279,43.506 C58A.2@-47.069,43.296
  Bottom Layer w0.5: v1(-23.5,32.2) -23.54,32.16 -24.14,32.16 C56A.2@-24.2,32.1 -24.2,33.057 -23.957,33.3 -23.45,33.3 IC5A.5@-23.4,33.35 ; v1(-23,32.7) -23,32.95 -23.1,33.05 -23.1,33.3 -23.15,33.35 IC5A.5@-23.4,33.35 ; v1(-22.8,31.9) -22.55,31.9 -21.9,32.55 C62A.2@-21.9,32.7 -21.9,32.85 -22.225,33.175 -22.375,33.175 -22.52,33.32 -23.37,33.32 IC5A.5@-23.4,33.35
P1V8_QDCB: C8B.2 C9B.2 C10B.2 C16B.2 C55B.2 C56B.2 C58B.2 C59B.2 C62B.2 C65B.1 IC5B.5 IC6B.16 IC6B.22 IC6B.33 IC6B.34 IC7B.16 IC7B.22 IC7B.33 IC7B.34 R22B.2 R23B.2 | length 24
  Top Layer w0.3: v1(-49.2,1.7) -48.65,1.7 C16B.2@-48.6,1.75 ; v1(-48.228,8.006) IC6B.22@-47.427,8.006 ; v1(-48.156,20.056) IC7B.22@-47.427,20.056 ; v1(-47.9,25.4) -47.8,25.5 R23B.2@-47.24,25.5 -47.1,25.36 -47.1,24.648 C8B.2@-46.953,24.501 -46.727,24.275 IC7B.16@-46.727,23.256 ; v1(-47.659,14.005) -47.656,14.002 -47.656,13.605 C9B.2@-47.316,13.265 ; v1(-47.621,11.654) -47.621,11.709 -47.476,11.853 -47.476,12.149 C10B.2@-47.316,12.309 -47.156,12.149 -47.012,12.149 -46.727,11.864 IC6B.16@-46.727,11.206 ; IC6B.33@-46.727,2.306 -46.727,2.006 -48.344,2.006 C16B.2@-48.6,1.75 ; IC7B.33@-46.727,14.356 -46.727,14.06 -46.981,14.06 -47.156,13.885 -47.156,13.425 -46.478,13.425 -46.227,13.676 IC7B.34@-46.227,14.356 ; IC6B.34@-46.227,2.306 -46.227,1.797 -46.311,1.714 -46.311,1.689 -46.6,1.4 -48.25,1.4 C16B.2@-48.6,1.75
  Bottom Layer w0.3: v1(-48.156,20.056) -48.118,20.094 -48.118,20.182 C55B.2@-47.6,20.7 ; v1(-47.9,25.4) C58B.2@-47.2,25.4 ; v1(-47.659,14.005) -47.659,13.951 -47.476,13.767 -47.476,13.425 C59B.2@-47.316,13.265 ; v1(-47.621,11.654) -47.582,11.616 -47.582,11.361 -47.247,11.026 R22B.2@-47.247,11.006
  Bottom Layer w0.5: C56B.2@-24.3,1.9 -24.3,2.907 -24.007,3.2 -23.45,3.2 IC5B.5@-23.4,3.25 -23.372,3.222 -22.422,3.222 -22.375,3.175 -22.225,3.175 -21.9,2.85 C62B.2@-21.9,2.7
  other v4: -22.1,5.7 -21.1,5.7
P3V3: "X4 - nowyA.6" "X4 - nowyA.7" "X4 - nowyB.6" "X4 - nowyB.7" B3.1 C15A.2 C15B.2 C36A.2 C36B.2 C37A.2 C37B.2 C38A.2 C38B.2 C39A.2 C39B.2 C40.2 C41.2 C42.2 C95A.2 C95B.2 C97A.2 C97B.2 C100A.2 C100B.2 C105.2 C106.2 C107.2 C108.2 C109.2 C110A.2 C110B.2 C111A.2 C111B.2 C112A.2 C112B.2 C116A.2 C116B.2 C197A.2 C197B.2 C198A.2 C198B.2 C199.2 C200A.2 C200B.2 C208A.2 C208B.2 C211A.2 C211B.2 C214A.2 C214B.2 C215A.2 C215B.2 C216A.2 C216B.2 C221A.2 C221B.2 C256.2 C257.2 C258.2 C259.2 DA2A.7 DA2B.7 DA22A.12 DA22B.12 DA22B.14 DA24A.4 DA24B.4 DD1A.8 DD1B.8 DD2A.1 DD2B.1 DD3.8 DD3.11 DD3.15 DD3.18 DD3.21 DD3.26 DD3.29 DD3.32 DD5.15 DD5.25 DD5.35 DD5.45 DD5.53 DD5.61 DD15A.8 DD15B.8 DD21A.1 DD21A.3 DD21A.9 DD21A.10 DD21A.11 DD21A.14 DD21A.15 DD21A.16 DD21A.22 DD21A.23 DD21B.1 DD21B.3 DD21B.9 DD21B.10 DD21B.11 DD21B.14 DD21B.15 DD21B.16 DD21B.22 DD21B.23 DD31.5 IC8A.AC15 IC8A.E9 IC8A.E14 IC8A.H10 IC8A.H15 IC8A.Y14 IC8B.AC15 IC8B.E9 IC8B.E14 IC8B.H10 IC8B.H15 IC8B.Y14 J2A.1 J2B.1 J3.1 L2A.1 L2B.1 L3.1 L4.1 L5.1 L6.1 LD2.2 LD3.2 R81A.2 R81B.2 R87.2 R144A.2 R144B.2 U1A.10 U1A.20 U1A.29 U1A.38 U1B.10 U1B.20 U1B.29 U1B.38 VD5A.3 VD5B.3 VD8.2 VD13.2 X11.2 ZQ2.4 | length 178.6
  Top Layer w0.2: v1(4.566,-15.314) B3.1@5.466,-15.314 v1(6.366,-15.314)
  Top Layer w0.254: R144B.2@66.363,-2.402 v1(66.959,-2.401)
  Top Layer w0.3: v1(-36.5,22.4) -36.4,22.5 -35.9,22.5 C36B.2@-35.8,22.6 ; v1(-36.449,52.182) -36.449,52.207 -36.196,52.46 -35.84,52.46 C15A.2@-35.7,52.6 ; v1(-36.414,21.36) -36.396,21.36 -36.216,21.54 -35.96,21.54 C37B.2@-35.8,21.7 -35.688,21.588 DD21B.16@-34.2,21.588 ; v1(-36.41,51.059) -36.41,51.064 -36.114,51.36 -36.04,51.36 C37A.2@-35.7,51.7 -35.637,51.637 -34.25,51.637 DD21A.16@-34.2,51.587 ; v1(-36.26,17.211) -36.222,17.25 -35.703,17.25 -35.65,17.303 -35.54,17.193 -34.25,17.193 DD21B.23@-34.2,17.143 ; v1(-35.772,48.139) -35.8,48.11 -35.8,47.3 C116A.2@-35.7,47.2 ; C36B.2@-35.66,22.74 -35.542,22.858 DD21B.14@-34.2,22.858 ; C116B.2@-35.65,17.4 -35.322,17.728 -34.25,17.728 DD21B.22@-34.2,17.778 ; C36B.2@-35.569,22.46 -35.323,22.214 DD21B.15@-34.209,22.214 ; DD21A.23@-34.2,47.142 -34.229,47.171 -35.671,47.171 C116A.2@-35.7,47.2 ; DD21A.22@-34.2,47.777 -34.215,47.792 -35.108,47.792 C116A.2@-35.7,47.2 ; DD21A.15@-34.2,52.222 -34.25,52.272 -35.372,52.272 C15A.2@-35.7,52.6 ; DD21A.14@-34.2,52.857 -34.25,52.807 -35.492,52.807 C15A.2@-35.7,52.6 ; DD21B.3@-28.8,17.778 -28.764,17.814 -27.336,17.814 C15B.2@-27.3,17.85 -27.14,18.01 -26.59,18.01 v1(-26.5,18.1) ; DD21B.9@-28.8,21.588 -28.75,21.638 -27.562,21.638 C38B.2@-27.3,21.9 ; DD21B.10@-28.8,22.223 -28.75,22.173 -27.573,22.173 C38B.2@-27.3,21.9 ; DD21B.11@-28.8,22.858 -28.75,22.808 -27.476,22.808 -27.3,22.632 C38B.2@-27.3,21.9 ; DD21A.3@-28.8,47.777 -28.75,47.827 -27.273,47.827 C38A.2@-27.2,47.9 -27.04,48.06 -27.04,47.997 -26.367,47.997 v1(-26.329,48.035) ; DD21A.9@-28.8,51.587 -28.75,51.637 -27.463,51.637 C39A.2@-27.2,51.9 ; DD21A.10@-28.8,52.222 -28.75,52.172 -27.472,52.172 C39A.2@-27.2,51.9 ; DD21A.11@-28.8,52.857 -28.75,52.807 -27.407,52.807 -27.2,52.6 C39A.2@-27.2,51.9 ; v1(-26.548,22.691) -26.548,22.637 -26.46,22.55 -26.46,22.06 C39B.2@-26.3,21.9 ; v1(-26.173,52.992) -26.186,52.979 -26.186,51.914 C36A.2@-26.2,51.9 ; DA24B.4@-25,21.95 -25.025,21.925 -26.275,21.925 C39B.2@-26.3,21.9 ; DA24A.4@-24.95,51.85 -24.975,51.875 -26.175,51.875 C36A.2@-26.2,51.9 ; v1(-21.8,9.7) -21.8,10.1 -21.46,10.44 -21.06,10.44 C95B.2@-20.9,10.6 -20.6,10.9 -19.475,10.9 DA2B.7@-19.4,10.975 ; v1(-21.1,38.7) -21,38.8 -21,39.564 -20.824,39.74 -20.46,39.74 C100A.2@-20.3,39.9 -20.262,39.937 -18.837,39.937 DA2A.7@-18.8,39.975 ; R81B.2@-21,16.9 -20.7,17.2 v1(-19.9,17.2) ; R81A.2@-20.7,46.8 -20.696,46.796 v1(-19.75,46.796) ; v1(-13.9,23.3) -13.4,23.3 C112B.2@-13.3,23.2 -12.6,22.5 -12.6,22.276 -12.424,22.1 U1B.10@-11.25,22.1 ; C97A.2@-12.9,53 -12.3,52.4 -12.3,52.022 -12.124,51.846 U1A.10@-11.25,51.846 ; v1(-8.6,15.6) -8,15.6 C100B.2@-7.9,15.7 -7.9,14.756 -7.825,14.681 DD1B.8@-7.458,14.681 ; v1(-8.2,45.886) -8.2,45.832 -8.16,45.792 -8.16,45.26 C95A.2@-8,45.1 -8.1,45 -8.1,44.126 -7.924,43.95 -6.875,43.95 DD1A.8@-6.8,43.875 ; U1B.20@-5.15,17.6 -4.5,17.6 -4.16,17.26 -3.66,17.26 C97B.2@-3.5,17.1 -3.462,17.138 -2.418,17.138 v1(-2.38,17.177) ; U1B.29@-5.15,22.1 -4.2,22.1 -4.101,22.001 -3.96,21.86 -3.66,21.86 -3.34,21.54 -2.823,21.54 -2.711,21.428 v1(-2.657,21.428) ; U1B.38@-5.15,26.6 -4.5,26.6 -4.3,26.8 -4.3,26.9 -4.16,27.04 -3.76,27.04 C111B.2@-3.6,27.2 v1(-3.6,27.9) ; U1A.20@-5.15,47.346 -4.5,47.346 -4.114,46.96 -3.76,46.96 C110A.2@-3.6,46.8 -3.5,46.9 v1(-3,46.9) ; U1A.29@-5.15,51.846 -4.246,51.846 -3.96,51.56 -3.76,51.56 C112A.2@-3.6,51.4 -3.5,51.5 v1(-2.9,51.5) ; U1A.38@-5.15,56.346 -4.5,56.346 -4.106,56.74 -3.76,56.74 C111A.2@-3.6,56.9 -3.44,56.74 -2.094,56.74 -2.054,56.7 v1(-2,56.7) ; v2(21.519,2.186) IC8B.H15@22.019,2.686 ; v2(21.519,18.186) IC8B.AC15@22.019,17.686 ; v2(21.519,38.086) IC8A.H15@22.019,38.586 ; v2(21.519,54.086) IC8A.AC15@22.019,53.586 ; v2(22.519,-0.859) IC8B.E14@23.019,-0.359 ; v2(22.519,15.186) IC8B.Y14@23.019,14.686 ; v2(22.519,35.086) IC8A.E14@23.019,35.586 ; v2(22.519,51.086) IC8A.Y14@23.019,50.586 ; 25.019,18.686 v2(25.519,19.186) ; 25.019,54.586 v2(25.519,55.086) ; IC8B.H10@27.019,2.686 v2(27.519,2.186) ; IC8A.H10@27.019,38.586 v2(27.519,38.086) ; IC8B.E9@28.019,-0.314 v2(28.519,-0.814) ; IC8A.E9@28.019,35.586 v2(28.519,35.086) ; v1(66.464,34.111) 66.489,34.135 66.489,34.923 R144A.2@66.513,34.948 ; v1(77.641,-16.662) 77.679,-16.624 78.159,-16.624 C106.2@78.319,-16.464 ; C106.2@78.344,-16.44 78.479,-16.304 78.755,-16.304 79.388,-15.671 DD3.32@79.999,-15.671 ; C40.2@78.677,-12.24 79.108,-12.671 DD3.26@79.999,-12.671 ; v1(79.202,-14.171) DD3.29@79.999,-14.171 ; DD3.21@82.249,-11.421 82.249,-10.294 C109.2@82.219,-10.264 v1(82.869,-10.264) C41.2@83.519,-10.264 83.749,-10.494 DD3.18@83.749,-11.421 ; DD3.15@85.249,-11.421 85.249,-10.384 C42.2@85.544,-10.088 v1(85.544,-9.435) ; DD3.8@86.999,-14.171 88.206,-14.171 C105.2@88.465,-14.43 88.625,-14.27 88.625,-13.765 88.677,-13.714 v1(88.677,-13.659) ; DD3.11@86.999,-12.671 87.853,-12.671 C108.2@88.17,-12.354 88.185,-12.369 88.192,-12.362 88.793,-12.362 v1(88.8,-12.369) ; v1(89.836,4.536) VD8.2@90.944,4.536 ; v1(89.886,-0.081) VD13.2@90.994,-0.081 ; v1(90.586,-2.314) LD3.2@91.294,-2.314 LD3.2@91.372,-2.314 ; v1(90.761,2.286) LD2.2@91.344,2.286 ; C38B.2@-27.3,21.9 C39B.2@-26.3,21.9 ; C39A.2@-27.2,51.9 C36A.2@-26.2,51.9
  Top Layer w0.4: v1(75.065,-20.951) L3.1@75.898,-20.951 ; v1(77.958,-12.225) 77.978,-12.244 78.5,-12.244 C40.2@78.519,-12.263 ; v1(92.204,-12.828) 93.106,-12.828 L5.1@93.118,-12.816 ; v1(93.313,-11.867) L5.1@93.313,-12.769 L5.1@93.325,-12.781 ; DD31.5@96.169,-9.364 96.174,-9.369 97.111,-9.369 v1(97.116,-9.374) ; v1(96.61,-25.365) C199.2@96.61,-24.282 96.61,-22.033 ZQ2.4@96.668,-21.975 ; v1(103.073,-12.232) C259.2@104.155,-12.232 ; C259.2@104.294,-12.214 C259.2@104.119,-12.214 104.444,-11.889 104.626,-11.889 105.201,-11.314 DD5.25@106.419,-11.314 ; DD5.15@108.911,-3.206 108.911,-1.123 C258.2@109.119,-0.914 ; C258.2@109.085,-0.91 v1(109.085,0.173) ; v1(110.319,-21.997) C257.2@110.319,-20.914 ; DD5.45@117.735,-18.63 117.735,-20.63 C256.2@118.019,-20.914 v1(118.019,-21.997) ; DD5.53@121.819,-13.714 v1(122.902,-13.714) ; DD5.61@121.819,-7.314 v1(122.902,-7.314)
  Top Layer w0.5: DD5.35@109.719,-18.614 109.719,-20.139 110.319,-20.739 C257.2@110.319,-20.914
  Bottom Layer w0.3: v1(-57.4,47.7) -57.3,47.6 -57.1,47.4 -57.1,46.625 DA22A.12@-57.025,46.55 ; DA22B.12@-57.025,16.35 -56.95,16.275 -56.95,15.35 v1(-56.9,15.3) ; DA22B.14@-55.725,16.35 -55.7,16.325 v1(-55.7,15.3) ; -34.981,-20.414 -34.981,-18.408 -35.069,-18.319 -34.919,-18.169 -34.274,-18.169 -34.268,-18.164 -33.13,-18.164 -32.881,-17.914 -32.881,-18.239 v2(-32.881,-18.714) ; L2B.1@-27.9,6.9 v1(-27.9,8.7) ; DD2A.1@-27,49.7 -26.85,49.55 -26.85,48.556 v1(-26.329,48.035) ; -23.34,25.98 -23.295,25.935 -23.295,24.295 VD5B.3@-23.25,24.25 ; -23.34,55.98 -23.27,55.91 -23.27,54.22 VD5A.3@-23.2,54.15 ; DD15A.8@-13.4,40.26 -12.925,40.26 -12.4,39.735 v1(-12.4,39.7) ; C221B.2@20.844,17.861 20.95,17.861 21.276,18.186 v2(21.519,18.186) ; C208A.2@21.492,35.022 21.58,35.11 22.468,35.11 22.492,35.086 v2(22.519,35.086) ; v2(21.519,54.086) 21.538,54.105 21.538,54.769 C221A.2@21.68,54.911 ; v2(22.519,-0.859) 22.546,-0.859 22.568,-0.88 23.22,-0.88 C198B.2@23.324,-0.776 23.327,-0.773 23.327,0.429 C200B.2@23.329,0.431 ; v2@22.546,35.086 v2(22.519,35.086) ; C198A.2@23.207,36.085 23.207,36.073 23.013,35.88 23.002,35.88 22.523,35.401 22.523,35.09 v2(22.519,35.086) ; C200A.2@24.291,54.709 25.115,54.709 v2@25.492,55.086 ; C214B.2@24.383,19.26 24.408,19.284 24.408,20.305 C215B.2@24.584,20.481 ; C214B.2@24.479,19.186 v2(25.519,19.186) ; C214B.2@24.479,19.336 C214B.2@24.479,19.341 ; C215A.2@24.788,55.776 25.478,55.086 v2@25.492,55.086 ; v2(25.519,55.086) v2@25.492,55.086 ; C211A.2@26.471,37.883 27.289,37.883 27.492,38.086 v2(27.519,38.086) v2@27.519,38.113 ; C211B.2@26.779,2.086 26.839,2.146 27.452,2.146 27.492,2.186 v2(27.519,2.186) ; C208B.2@28.444,-1.672 28.519,-1.597 v2(28.519,-0.814) ; v2(28.519,35.086) 29.013,34.592 C214A.2@30.294,34.592
  Bottom Layer w0.4: v1(79.519,-24.414) L6.1@79.519,-23.614 ; v1(90.06,-24.352) 90.06,-23.472 L4.1@90.066,-23.467 ; L4.1@90.067,-23.468 v1(91.143,-23.469) ; C107.2@96.382,-9.106 96.386,-9.109 96.832,-9.109 97.097,-9.374 v1(97.116,-9.374)
  Bottom Layer w0.5: C197B.2@20.319,2.307 20.455,2.171 21.504,2.171 v2(21.519,2.186) 21.519,1.648 20.96,1.089 C216B.2@20.96,1.084 ; C197A.2@20.319,38.207 20.455,38.071 21.504,38.071 v2(21.519,38.086) 21.519,37.548 20.96,36.989 C216A.2@20.96,36.984
  other v1: -2.821,28.68
P3V3_F_1: C33.2 DD3.34 DD3.35 L3.2 | length 6.4
  Top Layer w0.3: L3.2@77.698,-20.951 78.123,-20.526 78.123,-20.373 78.519,-19.977 C33.2@78.519,-18.914 78.519,-18.739 79.223,-18.036 79.223,-17.195 ; DD3.35@79.999,-17.171 79.247,-17.171 79.223,-17.195 ; DD3.34@79.999,-16.671 79.402,-16.671 79.223,-16.85 79.223,-17.195
P3V3_F_2: C34.2 C35.2 DD3.1 DD3.47 L4.2 | length 11.3
  Top Layer w0.3: v1(85.749,-19.384) DD3.47@85.749,-18.421 ; DD3.1@86.999,-17.671 v1(87.679,-17.671)
  Bottom Layer w0.3: v1(85.749,-19.384) 85.787,-19.423 85.787,-19.5 87.904,-21.617 C35.2@88.079,-21.617 ; v1(87.679,-17.671) 87.679,-18.486 C34.2@88.106,-18.913 ; C34.2@87.964,-18.985 88.328,-19.349 88.328,-21.368 C35.2@88.079,-21.617 ; L4.2@90.066,-21.667 90.016,-21.617 C35.2@88.079,-21.617
P3V3_F_3: C30.2 DD3.5 L5.2 | length 6.5
  Top Layer w0.3: DD3.5@86.999,-15.671 87.739,-15.671 87.83,-15.58 v1(87.884,-15.58) ; v1@90.619,-14.914 90.719,-14.814 L5.2@93.119,-14.814
  Bottom Layer w0.3: v1(87.884,-15.58) 87.899,-15.595 89.62,-15.595 C30.2@89.707,-15.682 ; C30.2@89.707,-15.507 90.3,-14.914 90.593,-14.914 v1(90.631,-14.876)
P3V3_F_4: C31.2 C32.2 DD3.39 DD3.42 L6.2 | length 10.4
  Top Layer w0.3: v1(81.749,-19.344) DD3.39@81.749,-18.421 ; v1(83.249,-19.344) DD3.42@83.249,-18.421
  Bottom Layer w0.3: L6.2@79.546,-21.593 C31.2@83.629,-21.593 ; v1(81.749,-19.344) v1(83.249,-19.344) 83.249,-21.037 83.319,-21.107 83.319,-21.282 C31.2@83.629,-21.593 ; C31.2@83.629,-21.593 83.694,-21.657 C31.2@83.869,-21.657 83.804,-21.593 C31.2@83.629,-21.593
P3V3_PG: DD13.1 DD13.2 | length 27.1
  Top Layer w0.2: v1(-69.497,-14.224) -69.497,-13.224 -67.707,-13.224 DD13.1@-67.607,-13.124 -67.607,-14.08 -67.49,-14.197 -66.46,-14.197 -66.366,-14.102 -66.276,-13.799 DD13.2@-66.337,-13.124
  Bottom Layer w0.15: v1(-70.591,-32.591) -70.591,-27.718 -66.997,-24.124 -66.997,-16.924 -69.431,-14.491 -69.431,-14.291 v1(-69.497,-14.224)
P3V3_QDCA: C87A.1 C90A.2 DA22A.4 DA26A.3 R247A.2 | length 44.8
  Mid-Layer 3 w0.5: v1(-55.8,39.2) -55.8,38.4 -53.6,36.2 -53.351,36.2 -53,35.849 -53,35.351 -53.1,35.251 -53.1,33.45 -53.9,32.65 v1(-53.9,30.4)
  Layer 1 w0.5: v1(-55.8,39.2) -55.4,39.6 -50.8,39.6 -50.75,39.65 -49.039,39.65 -48.589,39.2 -47.3,39.2 -47,39.5 -35.3,39.5 -34.6,40.2 v1(-30.8,40.2)
  Bottom Layer w0.3: DA22A.4@-56.375,40.65 -56.4,40.625 C90A.2@-56.4,39.2 -56.322,39.122 -55.878,39.122 v1(-55.8,39.2) ; R247A.2@-54.9,30.4 v1(-53.9,30.4) ; v1(-31,38.1) -30.525,38.1 -30.2,38.425 -29.875,38.1 v1(-29.4,38.1) ; v1(-30.8,40.2) -30.8,40.146 -30.525,39.871 -30.525,38.925 DA26A.3@-30.2,38.6 -29.875,38.925 -29.875,39.925 v1(-29.7,40.1)
P3V3_QDCB: C87B.1 C90B.2 DA22B.4 DA26B.3 R247B.2 | length 38.8
  Mid-Layer 3 w0.6: v1(-55.833,8.69) -55.85,8.673 -55.85,8.231 -54.569,6.95 -54.531,6.95 -53.1,5.519 -53.1,4 -53.8,3.3 v1(-53.8,1.2)
  Layer 1 w0.6: v1(-55.833,8.69) -55.833,8.787 -54.519,10.1 -49,10.1 -47.191,8.291 -34.512,8.291 -34.003,8.8 v4(-31.1,8.8)
  Bottom Layer w0.4: C90B.2@-56.4,9.1 -56.29,8.99 -56.132,8.99 v1(-55.833,8.69) ; C90B.2@-56.375,9.125 -56.387,9.137 -56.387,10.438 DA22B.4@-56.375,10.45
  Bottom Layer w0.6: R247B.2@-54.8,0.3 -54.575,0.3 -54,0.875 -54,0.9 -53.8,1.1 v1(-53.8,1.2)
  other v4: -31,6 -29.6,6 -29.5,8.8
P3V8: B2.1 L1A.1 L1B.1 R92.2 | length 2.4
  Bottom Layer w1: v1(-35.779,42.989) -34.875,42.989 -34.8,42.914 L1A.1@-34.8,42.8 ; L1B.1@-34.9,12.6 v1(-34.9,13.9)
  other v3: -38.212,-11.543 -36.812,-11.543 -35.412,-11.543
P5V0_AUX: C2.1 C11.2 C194.2 D6.2 DA21.1 DA21.6 DA21.8 DD10.4 DD10.8 DD13.14 IC2.1 R80.2 R83.2 R151.2 | length 22.2
  Top Layer w0.2: -70.896,-7.488 -70.398,-7.987 C11.2@-69.511,-7.987 ; v1(-70.587,-11.199) -69.523,-11.199 -69.497,-11.224 ; C11.2@-69.497,-7.974 -69.429,-7.906 -67.789,-7.906 DD13.14@-67.607,-7.724 ; v1(-30.297,-40.824) -29.722,-40.824 C194.2@-29.297,-40.724 -29.34,-40.682 DD10.8@-29.34,-38.864 ; v1(-25.641,-35.041) DD10.4@-24.141,-35.041 ; DA21.1@17.951,-19.406 18.071,-19.526 18.187,-19.526 v1(18.957,-20.296) 19.011,-20.242 19.011,-20.134 19.633,-19.511 20.086,-19.511 DA21.8@20.191,-19.406 ; v1@18.981,-20.32 19.367,-20.706 DA21.6@20.191,-20.706
  Top Layer w1: v3(111.018,-34.058) v3(111.018,-29.958)
  Bottom Layer w0.2: R80.2@-62.419,-5.321 -62.321,-5.42 -62.321,-5.669 -61.921,-6.069 v2(-61.921,-7.365) ; v2(-58.81,-7.665) -58.502,-7.357 R83.2@-58.502,-5.443
  other v3: -44.304,-43.891 -43.114,-43.891 -41.914,-43.891 -40.714,-43.891 -59.991,-30.081 -59.991,-28.891 -59.991,-27.691 -59.991,-26.491 -7.741,-25.041 -7.741,-23.841 -7.741,-22.641
P5V0_CFD1A: C89A.2 C126A.2 C288A.2 C305A.2 DA6A.6 DA6A.14 L25A.1 | length 16.4
  Top Layer w0.4: C89A.2@-77.7,9.6 v1(-77.7,10.4) ; C89A.2@-77.675,9.625 DA6A.6@-75.95,9.625 ; DA6A.14@-72.05,8.975 C288A.2@-70.425,8.975 ; C288A.2@-70.412,8.988 -70.29,9.11 v1@-70.29,9.603 ; v1(-70.3,9.8) -70.273,9.8 -70.173,9.9 C126A.2@-69.45,9.9 ; v1@-70.056,9.837 C126A.2@-69.513,9.837
  Layer 1 w0.5: v1(-77.7,10.4) -73.1,10.4 -72.5,9.8 v1(-70.3,9.8)
  Bottom Layer w0.4: v1(-77.7,10.4) -77.681,10.419 L25A.1@-76.598,10.419 -75.281,10.419 C305A.2@-75.2,10.5